# Altium PCB KUOZHAN.PCBDOC (part 19 of 21)
Units mm, origin at the board's own origin, x right, y up, seen from the top; angles counter-clockwise.
Board outline 165.51 x 116.38 mm, 2 copper layers (Top Layer, Bottom Layer); 171 components, 245 nets, 894 pads, 298 vias.
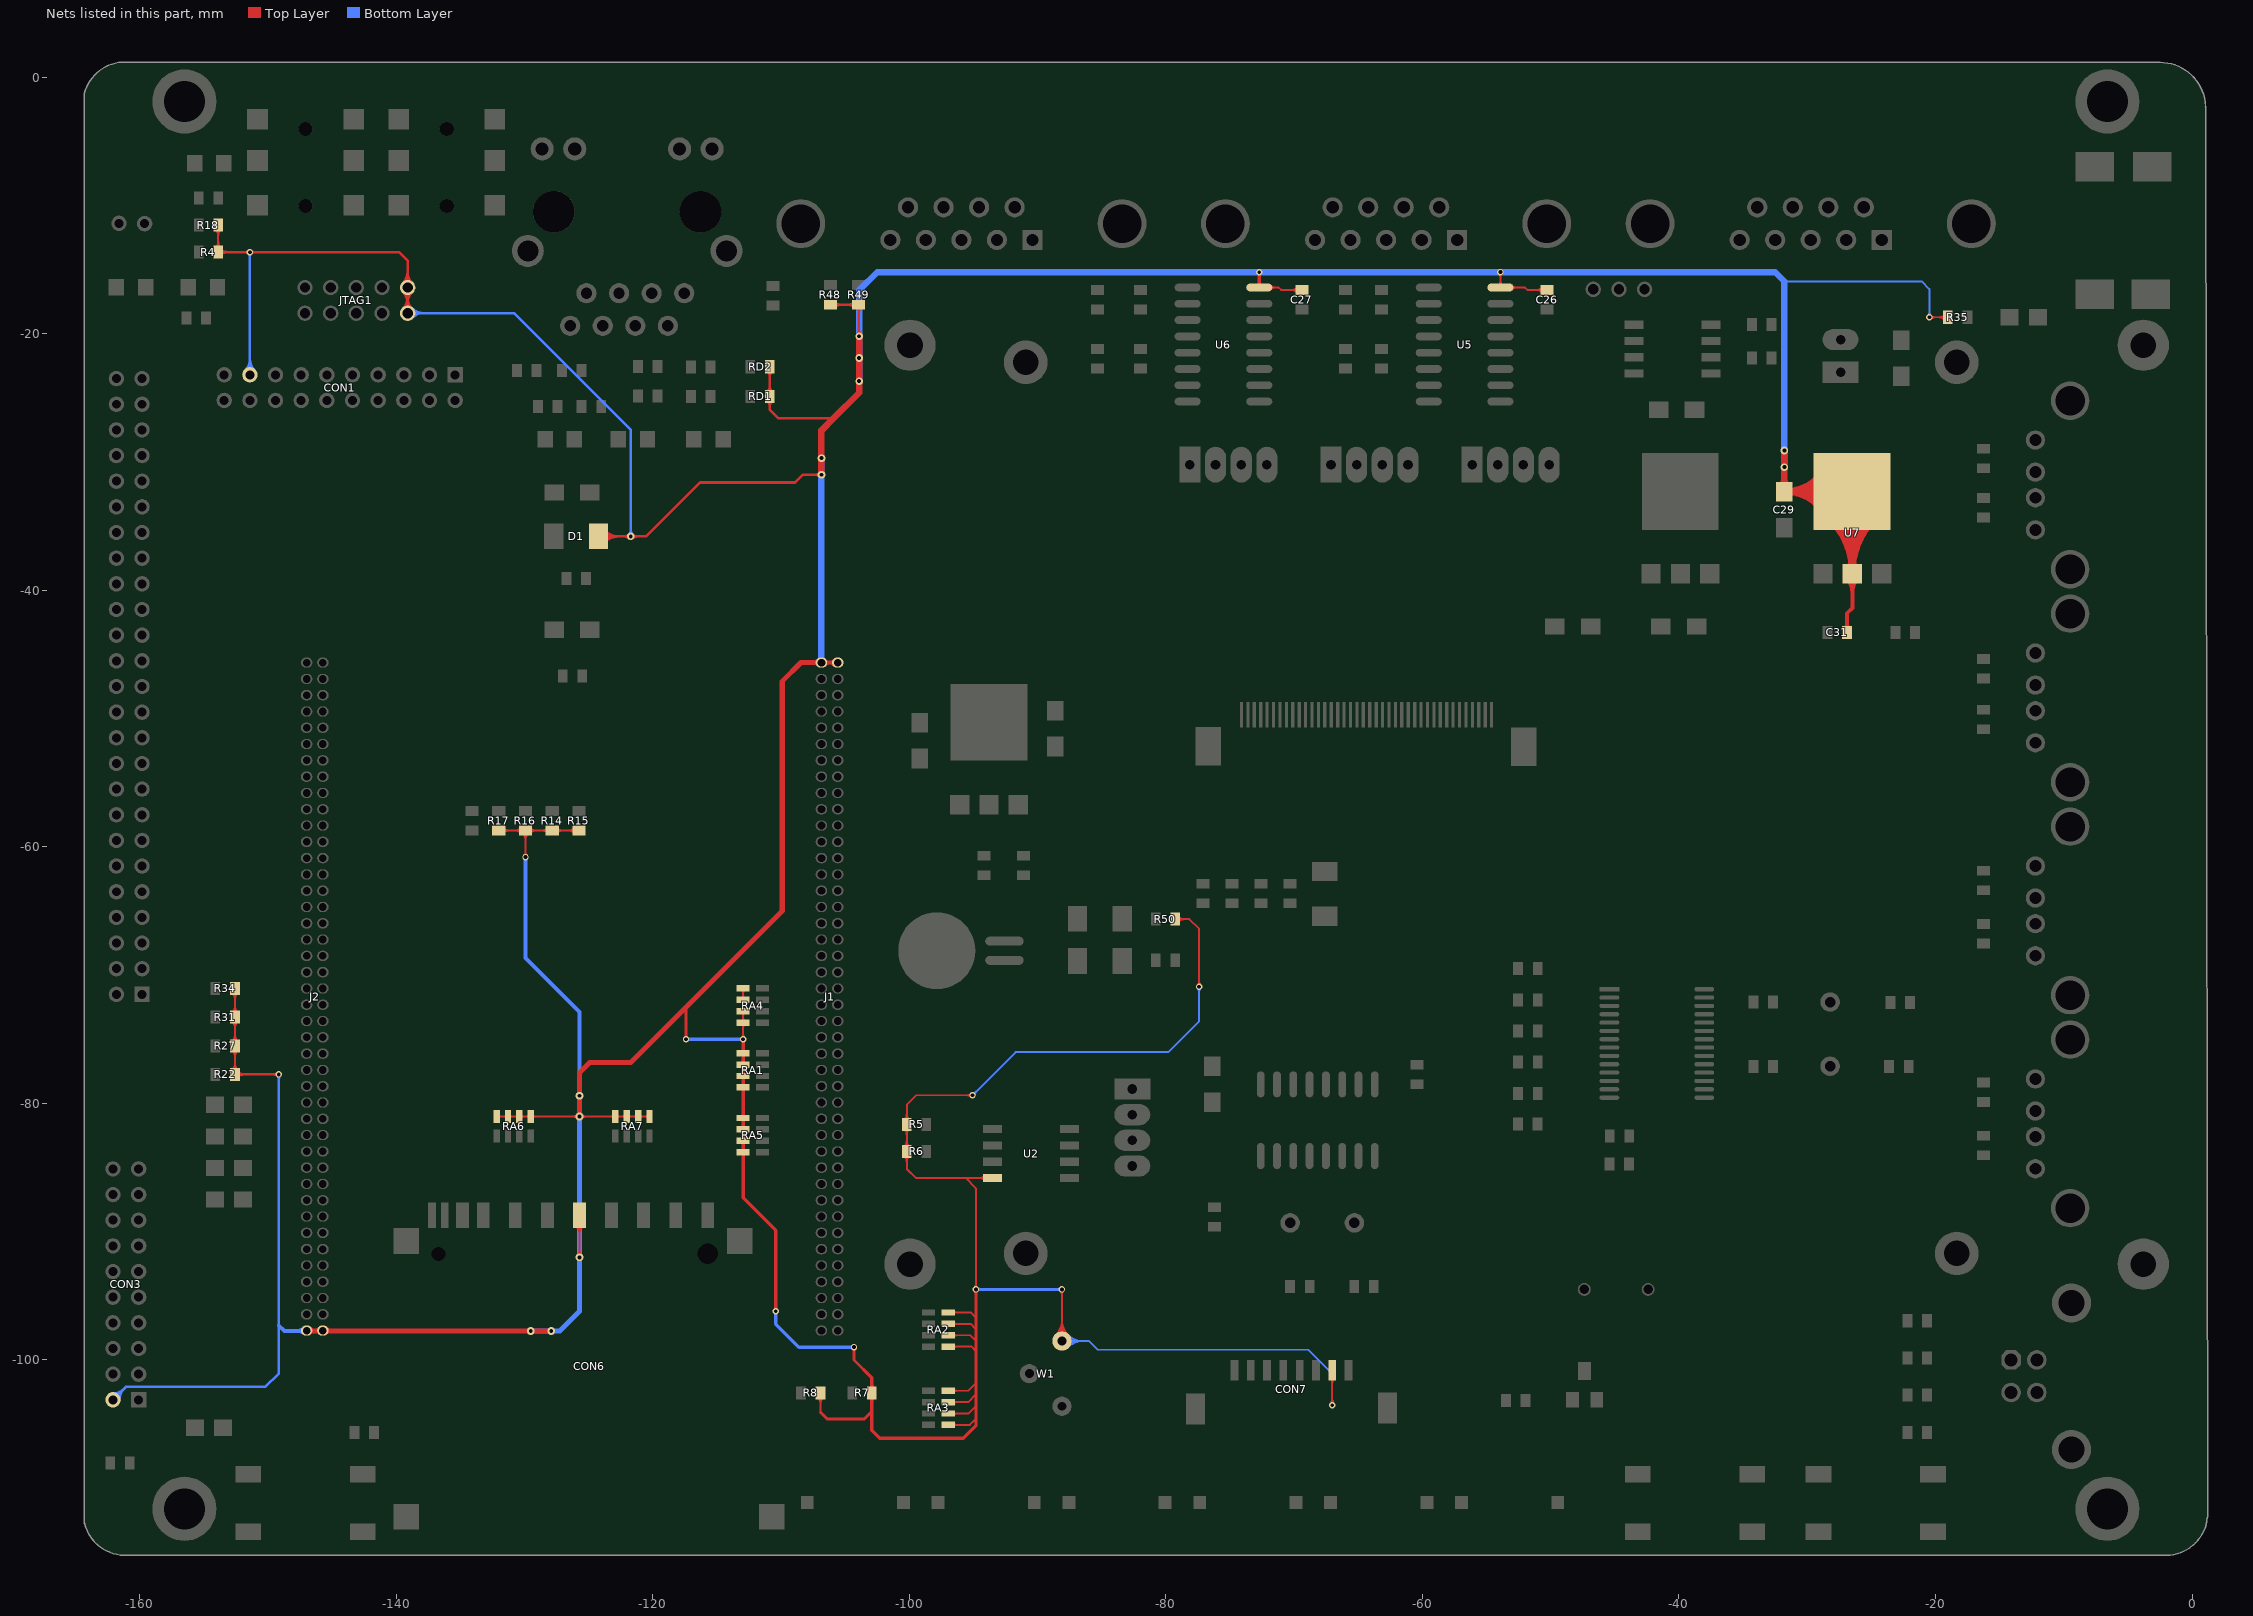
[diagram p19: the nets of this part, all layers, seen from the top]

## Via types
v1: diameter 0.5, hole 0.3, Top Layer to Bottom Layer, 272 vias
v2: diameter 0.6, hole 0.3, Top Layer to Bottom Layer, 24 vias
v3: diameter 0.9, hole 0.9, Top Layer to Bottom Layer, 2 vias

## Nets (pads, with @x,y where several pads share a name; then routed paths per layer and width w, separated by ;. In a path a pad name is that pad's centre, name@x,y a point inside that pad or via, vN(x,y) a via of type N, cw(c..) or ccw(c..) an arc to the next point about the centre after c; other vN are vias at no path point) (continued)
VDD33V: C26.1 C27.1 C29.1 C31.1 CON1.17 CON3.2 CON6.4 CON7.7 D1.1 J1.1 J1.2 J2.83 J2.84 JTAG1.1 JTAG1.2 R4.2 R5.1 R6.1 R7.1 R8.1 R14.1 R15.1 R16.1 R17.1 R18.2 R22.2 R27.2 R31.2 R34.2 R35.2 R48.2 R49.2 R50.2 RA1.5 RA1.6 RA1.7 RA1.8 RA2.5 RA2.6 RA2.7 RA2.8 RA3.5 RA3.6 RA3.7 RA3.8 RA4.5 RA4.6 RA4.7 RA4.8 RA5.5 RA5.6 RA5.7 RA5.8 RA6.1 RA6.2 RA6.3 RA6.4 RA7.1 RA7.2 RA7.3 RA7.4 RD1.2 RD2.2 U2.8 U5.16 U6.16 U7.3 U7.4 W1.2 | length 1499.5
  Top Layer w0.15: R4.2@-153.863,-13.64 R18.2@-153.863,-11.54 ; R22.2@-152.563,-77.74 R27.2@-152.563,-75.507 R31.2@-152.563,-73.274 R34.2@-152.563,-71.04 ; RA6.4@-132.163,-81.02 RA6.3@-131.274,-81.02 RA6.2@-130.385,-81.02 RA6.1@-129.496,-81.02 -125.703,-81.02 RA7.4@-122.909,-81.02 RA7.3@-122.02,-81.02 RA7.2@-121.131,-81.02 RA7.1@-120.242,-81.02 ; R17.1@-131.995,-58.724 R16.1@-129.91,-58.724 ; v1@-129.998,-60.712 ccw(c-130.212,-60.498) -129.91,-60.498 ccw(c-129.608,-60.498) v1@-129.822,-60.712 ; v1(-129.91,-60.8) R16.1@-129.91,-58.724 ; R15.1@-125.741,-58.724 R14.1@-127.825,-58.724 R16.1@-129.91,-58.724 ; v2@-125.703,-91.997 CON6.4@-125.703,-88.729 ; v1@-117.524,-74.876 ccw(c-117.822,-74.578) -117.4,-74.578 ccw(c-116.978,-74.578) v1@-117.276,-74.876 ; v1@-117.488,-74.912 ccw(c-117.702,-74.698) -117.4,-74.698 ccw(c-117.098,-74.698) v1@-117.312,-74.912 ; v1@-113.067,-75.124 cw(c-113.366,-75.422) -112.944,-75.422 cw(c-112.521,-75.422) v1@-112.82,-75.124 ; v1@-113.032,-75.088 cw(c-113.245,-75.302) -112.944,-75.302 cw(c-112.642,-75.302) v1@-112.855,-75.088 ; v1@-113.032,-74.912 ccw(c-113.245,-74.698) -112.944,-74.698 ccw(c-112.642,-74.698) v1@-112.855,-74.912 ; v1(-112.944,-75) RA4.8@-112.944,-73.704 RA4.7@-112.944,-72.815 RA4.6@-112.944,-71.926 RA4.5@-112.944,-71.037 ; -106.913,-104.087 R8.1@-106.913,-102.56 ; R5.1@-100.404,-81.297 ccw(c-100.926,-80.775) -100.187,-80.775 ccw(c-99.449,-80.775) R5.1@-99.971,-81.297 ; RA3.5@-96.956,-105.063 -95.263,-105.063 -94.8,-104.6 ; RA3.6@-96.956,-104.174 -95.4,-104.174 -94.826,-103.6 ; RA3.7@-96.956,-103.285 -95.4,-103.285 -94.8,-102.685 ; RA3.8@-96.956,-102.396 -95.5,-102.396 ; RA2.5@-96.956,-98.963 -95.137,-98.963 -94.8,-99.3 ; RA2.6@-96.956,-98.074 -95.226,-98.074 -94.8,-98.5 ; RA2.7@-96.956,-97.185 -95.215,-97.185 -94.8,-97.6 ; RA2.8@-96.956,-96.296 -95.204,-96.296 -94.8,-96.7 ; RA3.5@-96.575,-105.187 cw(c-96.276,-105.486) -96.276,-105.063 cw(c-96.276,-104.641) RA3.5@-96.575,-104.939 ; -95.4,-102.396 -95.5,-102.396 ; v1@-95.189,-79.489 ccw(c-95.488,-79.788) -95.488,-79.365 ccw(c-95.488,-78.943) v1@-95.189,-79.241 ; v1(-95.065,-79.365) -99.465,-79.365 -100.187,-80.087 R5.1@-100.187,-81.64 R6.1@-100.187,-83.74 -100.187,-85.113 -99.488,-85.812 -95.6,-85.812 ; -94.8,-101.8 -95.396,-102.396 -95.5,-102.396 ; v1(-94.8,-94.5) -94.8,-86.612 -95.6,-85.812 ; U2.8@-93.498,-85.812 -95.6,-85.812 ; v1@-88.095,-94.5 W1.2@-88.095,-98.527 W1.2@-88,-98.432 ; R50.2@-79.263,-65.64 -78.16,-65.64 -77.4,-66.4 v1(-77.4,-70.9) ; R50.2@-79.047,-65.857 cw(c-78.525,-66.379) -78.525,-65.64 cw(c-78.525,-64.902) R50.2@-79.047,-65.424 ; v1@-77.524,-70.776 ccw(c-77.822,-70.478) -77.4,-70.478 ccw(c-76.978,-70.478) v1@-77.276,-70.776 ; U6.16@-72.712,-16.4 -71.2,-16.4 -71.01,-16.59 C27.1@-69.383,-16.59 ; CON7.7@-67.184,-101.447 cw(c-67.568,-101.831) -67.025,-101.831 cw(c-66.482,-101.831) CON7.7@-66.866,-101.447 ; v1@-67.149,-103.401 ccw(c-67.447,-103.103) -67.025,-103.103 ccw(c-66.603,-103.103) v1@-66.901,-103.401 ; v1(-67.025,-103.525) CON7.7@-67.025,-100.788 ; v1@-54,-15.288 cw(c-54.214,-15.502) -53.912,-15.502 cw(c-53.61,-15.502) v1@-53.824,-15.288 ; v1@-53.912,-15.112 v1(-53.912,-15.2) U5.16@-53.912,-16.4 -52,-16.4 -51.81,-16.59 C26.1@-50.283,-16.59 ; v1(-20.481,-18.719) R35.2@-19.037,-18.719 ; v1@-20.357,-18.843 cw(c-20.058,-19.142) -20.058,-18.719 cw(c-20.058,-18.297) v1@-20.357,-18.595 ; R35.2@-19.253,-18.936 ccw(c-19.775,-19.458) -19.775,-18.719 ccw(c-19.775,-17.98) R35.2@-19.253,-18.503 ; R4.2@-154.08,-13.297 ccw(c-154.602,-12.775) -153.863,-12.775 ; R4.2@-154.08,-13.297 ccw(c-154.602,-12.775) -153.863,-12.775 ; R4.2@-154.08,-13.297 ccw(c-154.602,-12.775) -153.863,-12.775 ; R4.2@-154.08,-13.297 ccw(c-154.602,-12.775) -153.863,-12.775 ; R4.2@-154.08,-13.297 ccw(c-154.602,-12.775) -153.863,-12.775 ; R18.2@-154.08,-11.884 cw(c-154.602,-12.406) -153.863,-12.406 ; R18.2@-154.08,-11.884 cw(c-154.602,-12.406) -153.863,-12.406 ; R18.2@-154.08,-11.884 cw(c-154.602,-12.406) -153.863,-12.406 ; R18.2@-154.08,-11.884 cw(c-154.602,-12.406) -153.863,-12.406 ; R18.2@-154.08,-11.884 cw(c-154.602,-12.406) -153.863,-12.406 ; -153.863,-12.775 ccw(c-153.125,-12.775) R4.2@-153.647,-13.297 ; -153.863,-12.775 ccw(c-153.125,-12.775) R4.2@-153.647,-13.297 ; -153.863,-12.775 ccw(c-153.125,-12.775) R4.2@-153.647,-13.297 ; -153.863,-12.775 ccw(c-153.125,-12.775) R4.2@-153.647,-13.297 ; -153.863,-12.775 ccw(c-153.125,-12.775) R4.2@-153.647,-13.297 ; -153.863,-12.406 cw(c-153.125,-12.406) R18.2@-153.647,-11.884 ; -153.863,-12.406 cw(c-153.125,-12.406) R18.2@-153.647,-11.884 ; -153.863,-12.406 cw(c-153.125,-12.406) R18.2@-153.647,-11.884 ; -153.863,-12.406 cw(c-153.125,-12.406) R18.2@-153.647,-11.884 ; -153.863,-12.406 cw(c-153.125,-12.406) R18.2@-153.647,-11.884 ; R22.2@-152.78,-77.397 ccw(c-153.302,-76.875) -152.563,-76.875 ; R22.2@-152.78,-77.397 ccw(c-153.302,-76.875) -152.563,-76.875 ; R22.2@-152.78,-77.397 ccw(c-153.302,-76.875) -152.563,-76.875 ; R22.2@-152.78,-77.397 ccw(c-153.302,-76.875) -152.563,-76.875 ; R22.2@-152.78,-77.397 ccw(c-153.302,-76.875) -152.563,-76.875 ; R27.2@-152.78,-75.85 cw(c-153.302,-76.373) -152.563,-76.373 ; R27.2@-152.78,-75.85 cw(c-153.302,-76.373) -152.563,-76.373 ; R27.2@-152.78,-75.85 cw(c-153.302,-76.373) -152.563,-76.373 ; R27.2@-152.78,-75.85 cw(c-153.302,-76.373) -152.563,-76.373 ; R27.2@-152.78,-75.85 cw(c-153.302,-76.373) -152.563,-76.373 ; R27.2@-152.78,-75.164 ccw(c-153.302,-74.641) -152.563,-74.641 ; R27.2@-152.78,-75.164 ccw(c-153.302,-74.641) -152.563,-74.641 ; R27.2@-152.78,-75.164 ccw(c-153.302,-74.641) -152.563,-74.641 ; R27.2@-152.78,-75.164 ccw(c-153.302,-74.641) -152.563,-74.641 ; R27.2@-152.78,-75.164 ccw(c-153.302,-74.641) -152.563,-74.641 ; R31.2@-152.78,-73.617 cw(c-153.302,-74.139) -152.563,-74.139 ; R31.2@-152.78,-73.617 cw(c-153.302,-74.139) -152.563,-74.139 ; R31.2@-152.78,-73.617 cw(c-153.302,-74.139) -152.563,-74.139 ; R31.2@-152.78,-73.617 cw(c-153.302,-74.139) -152.563,-74.139 ; R31.2@-152.78,-73.617 cw(c-153.302,-74.139) -152.563,-74.139 ; R31.2@-152.78,-72.93 ccw(c-153.302,-72.408) -152.563,-72.408 ; R31.2@-152.78,-72.93 ccw(c-153.302,-72.408) -152.563,-72.408 ; R31.2@-152.78,-72.93 ccw(c-153.302,-72.408) -152.563,-72.408 ; R31.2@-152.78,-72.93 ccw(c-153.302,-72.408) -152.563,-72.408 ; R31.2@-152.78,-72.93 ccw(c-153.302,-72.408) -152.563,-72.408 ; R34.2@-152.78,-71.384 cw(c-153.302,-71.906) -152.563,-71.906 ; R34.2@-152.78,-71.384 cw(c-153.302,-71.906) -152.563,-71.906 ; R34.2@-152.78,-71.384 cw(c-153.302,-71.906) -152.563,-71.906 ; R34.2@-152.78,-71.384 cw(c-153.302,-71.906) -152.563,-71.906 ; R34.2@-152.78,-71.384 cw(c-153.302,-71.906) -152.563,-71.906 ; -152.563,-76.875 ccw(c-151.825,-76.875) R22.2@-152.347,-77.397 ; -152.563,-76.875 ccw(c-151.825,-76.875) R22.2@-152.347,-77.397 ; -152.563,-76.875 ccw(c-151.825,-76.875) R22.2@-152.347,-77.397 ; -152.563,-76.875 ccw(c-151.825,-76.875) R22.2@-152.347,-77.397 ; -152.563,-76.875 ccw(c-151.825,-76.875) R22.2@-152.347,-77.397 ; -152.563,-76.373 cw(c-151.825,-76.373) R27.2@-152.347,-75.85 ; -152.563,-76.373 cw(c-151.825,-76.373) R27.2@-152.347,-75.85 ; -152.563,-76.373 cw(c-151.825,-76.373) R27.2@-152.347,-75.85 ; -152.563,-76.373 cw(c-151.825,-76.373) R27.2@-152.347,-75.85 ; -152.563,-76.373 cw(c-151.825,-76.373) R27.2@-152.347,-75.85 ; -152.563,-74.641 ccw(c-151.825,-74.641) R27.2@-152.347,-75.164 ; -152.563,-74.641 ccw(c-151.825,-74.641) R27.2@-152.347,-75.164 ; -152.563,-74.641 ccw(c-151.825,-74.641) R27.2@-152.347,-75.164 ; -152.563,-74.641 ccw(c-151.825,-74.641) R27.2@-152.347,-75.164 ; -152.563,-74.641 ccw(c-151.825,-74.641) R27.2@-152.347,-75.164 ; -152.563,-74.139 cw(c-151.825,-74.139) R31.2@-152.347,-73.617 ; -152.563,-74.139 cw(c-151.825,-74.139) R31.2@-152.347,-73.617 ; -152.563,-74.139 cw(c-151.825,-74.139) R31.2@-152.347,-73.617 ; -152.563,-74.139 cw(c-151.825,-74.139) R31.2@-152.347,-73.617 ; -152.563,-74.139 cw(c-151.825,-74.139) R31.2@-152.347,-73.617 ; -152.563,-72.408 ccw(c-151.825,-72.408) R31.2@-152.347,-72.93 ; -152.563,-72.408 ccw(c-151.825,-72.408) R31.2@-152.347,-72.93 ; -152.563,-72.408 ccw(c-151.825,-72.408) R31.2@-152.347,-72.93 ; -152.563,-72.408 ccw(c-151.825,-72.408) R31.2@-152.347,-72.93 ; -152.563,-72.408 ccw(c-151.825,-72.408) R31.2@-152.347,-72.93 ; -152.563,-71.906 cw(c-151.825,-71.906) R34.2@-152.347,-71.384 ; -152.563,-71.906 cw(c-151.825,-71.906) R34.2@-152.347,-71.384 ; -152.563,-71.906 cw(c-151.825,-71.906) R34.2@-152.347,-71.384 ; -152.563,-71.906 cw(c-151.825,-71.906) R34.2@-152.347,-71.384 ; -152.563,-71.906 cw(c-151.825,-71.906) R34.2@-152.347,-71.384 ; RA6.4@-132.039,-81.143 cw(c-131.741,-81.442) -131.741,-81.02 ; RA6.4@-132.039,-81.143 cw(c-131.741,-81.442) -131.741,-81.02 ; RA6.4@-132.039,-81.143 cw(c-131.741,-81.442) -131.741,-81.02 ; RA6.4@-132.039,-81.143 cw(c-131.741,-81.442) -131.741,-81.02 ; RA6.4@-132.039,-81.143 cw(c-131.741,-81.442) -131.741,-81.02 ; RA6.4@-132.039,-80.896 ccw(c-131.741,-80.597) -131.741,-81.02 ; RA6.4@-132.039,-80.896 ccw(c-131.741,-80.597) -131.741,-81.02 ; RA6.4@-132.039,-80.896 ccw(c-131.741,-80.597) -131.741,-81.02 ; RA6.4@-132.039,-80.896 ccw(c-131.741,-80.597) -131.741,-81.02 ; RA6.4@-132.039,-80.896 ccw(c-131.741,-80.597) -131.741,-81.02 ; -131.697,-81.02 cw(c-131.697,-81.442) RA6.3@-131.398,-81.143 ; -131.697,-81.02 ccw(c-131.697,-80.597) RA6.3@-131.398,-80.896 ; -131.697,-81.02 cw(c-131.697,-81.442) RA6.3@-131.398,-81.143 ; -131.697,-81.02 ccw(c-131.697,-80.597) RA6.3@-131.398,-80.896 ; -131.697,-81.02 cw(c-131.697,-81.442) RA6.3@-131.398,-81.143 ; -131.697,-81.02 ccw(c-131.697,-80.597) RA6.3@-131.398,-80.896 ; -131.697,-81.02 cw(c-131.697,-81.442) RA6.3@-131.398,-81.143 ; -131.697,-81.02 ccw(c-131.697,-80.597) RA6.3@-131.398,-80.896 ; -131.697,-81.02 ccw(c-131.697,-80.597) RA6.3@-131.398,-80.896 ; -131.697,-81.02 cw(c-131.697,-81.442) RA6.3@-131.398,-81.143 ; R17.1@-131.651,-58.94 cw(c-131.129,-59.463) -131.129,-58.724 ; R17.1@-131.651,-58.94 cw(c-131.129,-59.463) -131.129,-58.724 ; R17.1@-131.651,-58.94 cw(c-131.129,-59.463) -131.129,-58.724 ; R17.1@-131.651,-58.94 cw(c-131.129,-59.463) -131.129,-58.724 ; R17.1@-131.651,-58.94 cw(c-131.129,-59.463) -131.129,-58.724 ; R17.1@-131.651,-58.508 ccw(c-131.129,-57.985) -131.129,-58.724 ; R17.1@-131.651,-58.508 ccw(c-131.129,-57.985) -131.129,-58.724 ; R17.1@-131.651,-58.508 ccw(c-131.129,-57.985) -131.129,-58.724 ; R17.1@-131.651,-58.508 ccw(c-131.129,-57.985) -131.129,-58.724 ; R17.1@-131.651,-58.508 ccw(c-131.129,-57.985) -131.129,-58.724 ; RA6.3@-131.15,-81.143 cw(c-130.852,-81.442) -130.852,-81.02 ; RA6.3@-131.15,-81.143 cw(c-130.852,-81.442) -130.852,-81.02 ; RA6.3@-131.15,-81.143 cw(c-130.852,-81.442) -130.852,-81.02 ; RA6.3@-131.15,-81.143 cw(c-130.852,-81.442) -130.852,-81.02 ; RA6.3@-131.15,-81.143 cw(c-130.852,-81.442) -130.852,-81.02 ; RA6.3@-131.15,-80.896 ccw(c-130.852,-80.597) -130.852,-81.02 ; RA6.3@-131.15,-80.896 ccw(c-130.852,-80.597) -130.852,-81.02 ; RA6.3@-131.15,-80.896 ccw(c-130.852,-80.597) -130.852,-81.02 ; RA6.3@-131.15,-80.896 ccw(c-130.852,-80.597) -130.852,-81.02 ; RA6.3@-131.15,-80.896 ccw(c-130.852,-80.597) -130.852,-81.02 ; -130.808,-81.02 cw(c-130.808,-81.442) RA6.2@-130.509,-81.143 ; -130.808,-81.02 ccw(c-130.808,-80.597) RA6.2@-130.509,-80.896 ; -130.808,-81.02 cw(c-130.808,-81.442) RA6.2@-130.509,-81.143 ; -130.808,-81.02 ccw(c-130.808,-80.597) RA6.2@-130.509,-80.896 ; -130.808,-81.02 cw(c-130.808,-81.442) RA6.2@-130.509,-81.143 ; -130.808,-81.02 ccw(c-130.808,-80.597) RA6.2@-130.509,-80.896 ; -130.808,-81.02 cw(c-130.808,-81.442) RA6.2@-130.509,-81.143 ; -130.808,-81.02 ccw(c-130.808,-80.597) RA6.2@-130.509,-80.896 ; -130.808,-81.02 ccw(c-130.808,-80.597) RA6.2@-130.509,-80.896 ; -130.808,-81.02 cw(c-130.808,-81.442) RA6.2@-130.509,-81.143 ; -130.776,-58.724 cw(c-130.776,-59.463) R16.1@-130.253,-58.94 ; -130.776,-58.724 ccw(c-130.776,-57.985) R16.1@-130.253,-58.508 ; -130.776,-58.724 cw(c-130.776,-59.463) R16.1@-130.253,-58.94 ; -130.776,-58.724 ccw(c-130.776,-57.985) R16.1@-130.253,-58.508 ; -130.776,-58.724 cw(c-130.776,-59.463) R16.1@-130.253,-58.94 ; -130.776,-58.724 ccw(c-130.776,-57.985) R16.1@-130.253,-58.508 ; -130.776,-58.724 cw(c-130.776,-59.463) R16.1@-130.253,-58.94 ; -130.776,-58.724 ccw(c-130.776,-57.985) R16.1@-130.253,-58.508 ; -130.776,-58.724 ccw(c-130.776,-57.985) R16.1@-130.253,-58.508 ; -130.776,-58.724 cw(c-130.776,-59.463) R16.1@-130.253,-58.94 ; RA6.2@-130.261,-81.143 cw(c-129.963,-81.442) -129.963,-81.02 ; RA6.2@-130.261,-81.143 cw(c-129.963,-81.442) -129.963,-81.02 ; RA6.2@-130.261,-81.143 cw(c-129.963,-81.442) -129.963,-81.02 ; RA6.2@-130.261,-81.143 cw(c-129.963,-81.442) -129.963,-81.02 ; RA6.2@-130.261,-81.143 cw(c-129.963,-81.442) -129.963,-81.02 ; RA6.2@-130.261,-80.896 ccw(c-129.963,-80.597) -129.963,-81.02 ; RA6.2@-130.261,-80.896 ccw(c-129.963,-80.597) -129.963,-81.02 ; RA6.2@-130.261,-80.896 ccw(c-129.963,-80.597) -129.963,-81.02 ; RA6.2@-130.261,-80.896 ccw(c-129.963,-80.597) -129.963,-81.02 ; RA6.2@-130.261,-80.896 ccw(c-129.963,-80.597) -129.963,-81.02 ; R16.1@-130.126,-58.94 cw(c-130.649,-59.463) -129.91,-59.463 ; R16.1@-130.126,-58.94 cw(c-130.649,-59.463) -129.91,-59.463 ; R16.1@-130.126,-58.94 cw(c-130.649,-59.463) -129.91,-59.463 ; R16.1@-130.126,-58.94 cw(c-130.649,-59.463) -129.91,-59.463 ; R16.1@-130.126,-58.94 cw(c-130.649,-59.463) -129.91,-59.463 ; v1@-130.034,-60.676 ccw(c-130.333,-60.378) -129.91,-60.378 ; v1@-130.034,-60.676 ccw(c-130.333,-60.378) -129.91,-60.378 ; v1@-130.034,-60.676 ccw(c-130.333,-60.378) -129.91,-60.378 ; v1@-130.034,-60.676 ccw(c-130.333,-60.378) -129.91,-60.378 ; -129.919,-81.02 cw(c-129.919,-81.442) RA6.1@-129.62,-81.143 ; -129.919,-81.02 ccw(c-129.919,-80.597) RA6.1@-129.62,-80.896 ; -129.919,-81.02 cw(c-129.919,-81.442) RA6.1@-129.62,-81.143 ; -129.919,-81.02 ccw(c-129.919,-80.597) RA6.1@-129.62,-80.896 ; -129.919,-81.02 cw(c-129.919,-81.442) RA6.1@-129.62,-81.143 ; -129.919,-81.02 ccw(c-129.919,-80.597) RA6.1@-129.62,-80.896 ; -129.919,-81.02 cw(c-129.919,-81.442) RA6.1@-129.62,-81.143 ; -129.919,-81.02 ccw(c-129.919,-80.597) RA6.1@-129.62,-80.896 ; -129.919,-81.02 ccw(c-129.919,-80.597) RA6.1@-129.62,-80.896 ; -129.919,-81.02 cw(c-129.919,-81.442) RA6.1@-129.62,-81.143 ; -129.91,-60.378 ccw(c-129.488,-60.378) v1@-129.786,-60.676 ; -129.91,-60.378 ccw(c-129.488,-60.378) v1@-129.786,-60.676 ; -129.91,-60.378 ccw(c-129.488,-60.378) v1@-129.786,-60.676 ; -129.91,-60.378 ccw(c-129.488,-60.378) v1@-129.786,-60.676 ; -129.91,-59.463 cw(c-129.171,-59.463) R16.1@-129.694,-58.94 ; -129.91,-59.463 cw(c-129.171,-59.463) R16.1@-129.694,-58.94 ; -129.91,-59.463 cw(c-129.171,-59.463) R16.1@-129.694,-58.94 ; -129.91,-59.463 cw(c-129.171,-59.463) R16.1@-129.694,-58.94 ; -129.91,-59.463 cw(c-129.171,-59.463) R16.1@-129.694,-58.94 ; R16.1@-129.567,-58.94 cw(c-129.044,-59.463) -129.044,-58.724 ; R16.1@-129.567,-58.94 cw(c-129.044,-59.463) -129.044,-58.724 ; R16.1@-129.567,-58.94 cw(c-129.044,-59.463) -129.044,-58.724 ; R16.1@-129.567,-58.94 cw(c-129.044,-59.463) -129.044,-58.724 ; R16.1@-129.567,-58.94 cw(c-129.044,-59.463) -129.044,-58.724 ; R16.1@-129.567,-58.508 ccw(c-129.044,-57.985) -129.044,-58.724 ; R16.1@-129.567,-58.508 ccw(c-129.044,-57.985) -129.044,-58.724 ; R16.1@-129.567,-58.508 ccw(c-129.044,-57.985) -129.044,-58.724 ; R16.1@-129.567,-58.508 ccw(c-129.044,-57.985) -129.044,-58.724 ; R16.1@-129.567,-58.508 ccw(c-129.044,-57.985) -129.044,-58.724 ; RA6.1@-129.372,-81.143 cw(c-129.074,-81.442) -129.074,-81.02 ; RA6.1@-129.372,-81.143 cw(c-129.074,-81.442) -129.074,-81.02 ; RA6.1@-129.372,-81.143 cw(c-129.074,-81.442) -129.074,-81.02 ; RA6.1@-129.372,-81.143 cw(c-129.074,-81.442) -129.074,-81.02 ; RA6.1@-129.372,-81.143 cw(c-129.074,-81.442) -129.074,-81.02 ; RA6.1@-129.372,-80.896 ccw(c-129.074,-80.597) -129.074,-81.02 ; RA6.1@-129.372,-80.896 ccw(c-129.074,-80.597) -129.074,-81.02 ; RA6.1@-129.372,-80.896 ccw(c-129.074,-80.597) -129.074,-81.02 ; RA6.1@-129.372,-80.896 ccw(c-129.074,-80.597) -129.074,-81.02 ; RA6.1@-129.372,-80.896 ccw(c-129.074,-80.597) -129.074,-81.02 ; -128.691,-58.724 cw(c-128.691,-59.463) R14.1@-128.169,-58.94 ; -128.691,-58.724 ccw(c-128.691,-57.985) R14.1@-128.169,-58.508 ; -128.691,-58.724 cw(c-128.691,-59.463) R14.1@-128.169,-58.94 ; -128.691,-58.724 ccw(c-128.691,-57.985) R14.1@-128.169,-58.508 ; -128.691,-58.724 cw(c-128.691,-59.463) R14.1@-128.169,-58.94 ; -128.691,-58.724 ccw(c-128.691,-57.985) R14.1@-128.169,-58.508 ; -128.691,-58.724 cw(c-128.691,-59.463) R14.1@-128.169,-58.94 ; -128.691,-58.724 ccw(c-128.691,-57.985) R14.1@-128.169,-58.508 ; -128.691,-58.724 ccw(c-128.691,-57.985) R14.1@-128.169,-58.508 ; -128.691,-58.724 cw(c-128.691,-59.463) R14.1@-128.169,-58.94 ; R14.1@-127.482,-58.94 cw(c-126.96,-59.463) -126.96,-58.724 ; R14.1@-127.482,-58.94 cw(c-126.96,-59.463) -126.96,-58.724 ; R14.1@-127.482,-58.94 cw(c-126.96,-59.463) -126.96,-58.724 ; R14.1@-127.482,-58.94 cw(c-126.96,-59.463) -126.96,-58.724 ; R14.1@-127.482,-58.94 cw(c-126.96,-59.463) -126.96,-58.724 ; R14.1@-127.482,-58.508 ccw(c-126.96,-57.985) -126.96,-58.724 ; R14.1@-127.482,-58.508 ccw(c-126.96,-57.985) -126.96,-58.724 ; R14.1@-127.482,-58.508 ccw(c-126.96,-57.985) -126.96,-58.724 ; R14.1@-127.482,-58.508 ccw(c-126.96,-57.985) -126.96,-58.724 ; R14.1@-127.482,-58.508 ccw(c-126.96,-57.985) -126.96,-58.724 ; -126.607,-58.724 cw(c-126.607,-59.463) R15.1@-126.084,-58.94 ; -126.607,-58.724 ccw(c-126.607,-57.985) R15.1@-126.084,-58.508 ; -126.607,-58.724 cw(c-126.607,-59.463) R15.1@-126.084,-58.94 ; -126.607,-58.724 ccw(c-126.607,-57.985) R15.1@-126.084,-58.508 ; -126.607,-58.724 cw(c-126.607,-59.463) R15.1@-126.084,-58.94 ; -126.607,-58.724 ccw(c-126.607,-57.985) R15.1@-126.084,-58.508 ; -126.607,-58.724 cw(c-126.607,-59.463) R15.1@-126.084,-58.94 ; -126.607,-58.724 ccw(c-126.607,-57.985) R15.1@-126.084,-58.508 ; -126.607,-58.724 ccw(c-126.607,-57.985) R15.1@-126.084,-58.508 ; -126.607,-58.724 cw(c-126.607,-59.463) R15.1@-126.084,-58.94 ; -126.253,-81.02 cw(c-126.253,-81.573) v2@-125.862,-81.182 ; -126.253,-81.02 cw(c-126.253,-81.573) v2@-125.862,-81.182 ; -126.253,-81.02 cw(c-126.253,-81.573) v2@-125.862,-81.182 ; -126.253,-81.02 cw(c-126.253,-81.573) v2@-125.862,-81.182 ; -126.253,-81.02 cw(c-126.253,-81.573) v2@-125.862,-81.182 ; -126.239,-81.02 ccw(c-126.239,-80.487) v2@-125.862,-80.864 ; -126.239,-81.02 ccw(c-126.239,-80.487) v2@-125.862,-80.864 ; -126.239,-81.02 ccw(c-126.239,-80.487) v2@-125.862,-80.864 ; -126.239,-81.02 ccw(c-126.239,-80.487) v2@-125.862,-80.864 ; -126.239,-81.02 ccw(c-126.239,-80.487) v2@-125.862,-80.864 ; CON6.4@-126.004,-89.529 cw(c-126.729,-90.255) -125.703,-90.255 ; CON6.4@-126.004,-89.529 cw(c-126.729,-90.255) -125.703,-90.255 ; CON6.4@-126.004,-89.529 cw(c-126.729,-90.255) -125.703,-90.255 ; CON6.4@-126.004,-89.529 cw(c-126.729,-90.255) -125.703,-90.255 ; CON6.4@-126.004,-89.529 cw(c-126.729,-90.255) -125.703,-90.255 ; CON6.4@-125.897,-89.423 cw(c-126.367,-89.893) -125.703,-89.893 ; CON6.4@-125.897,-89.423 cw(c-126.367,-89.893) -125.703,-89.893 ; CON6.4@-125.897,-89.423 cw(c-126.367,-89.893) -125.703,-89.893 ; CON6.4@-125.897,-89.423 cw(c-126.367,-89.893) -125.703,-89.893 ; CON6.4@-125.897,-89.423 cw(c-126.367,-89.893) -125.703,-89.893 ; v2@-125.862,-91.844 ccw(c-126.246,-91.46) -125.703,-91.46 ; v2@-125.862,-91.844 ccw(c-126.246,-91.46) -125.703,-91.46 ; v2@-125.862,-91.844 ccw(c-126.246,-91.46) -125.703,-91.46 ; v2@-125.862,-91.844 ccw(c-126.246,-91.46) -125.703,-91.46 ; v2@-125.862,-91.844 ccw(c-126.246,-91.46) -125.703,-91.46 ; -125.703,-91.46 ccw(c-125.16,-91.46) v2@-125.544,-91.844 ; -125.703,-91.46 ccw(c-125.16,-91.46) v2@-125.544,-91.844 ; -125.703,-91.46 ccw(c-125.16,-91.46) v2@-125.544,-91.844 ; -125.703,-91.46 ccw(c-125.16,-91.46) v2@-125.544,-91.844 ; -125.703,-91.46 ccw(c-125.16,-91.46) v2@-125.544,-91.844 ; -125.703,-90.255 cw(c-124.677,-90.255) CON6.4@-125.402,-89.529 ; -125.703,-90.255 cw(c-124.677,-90.255) CON6.4@-125.402,-89.529 ; -125.703,-90.255 cw(c-124.677,-90.255) CON6.4@-125.402,-89.529 ; -125.703,-90.255 cw(c-124.677,-90.255) CON6.4@-125.402,-89.529 ; -125.703,-90.255 cw(c-124.677,-90.255) CON6.4@-125.402,-89.529 ; -125.703,-89.893 cw(c-125.039,-89.893) CON6.4@-125.509,-89.423 ; -125.703,-89.893 cw(c-125.039,-89.893) CON6.4@-125.509,-89.423 ; -125.703,-89.893 cw(c-125.039,-89.893) CON6.4@-125.509,-89.423 ; -125.703,-89.893 cw(c-125.039,-89.893) CON6.4@-125.509,-89.423 ; -125.703,-89.893 cw(c-125.039,-89.893) CON6.4@-125.509,-89.423 ; v2@-125.544,-81.182 cw(c-125.153,-81.573) -125.153,-81.02 ; v2@-125.544,-81.182 cw(c-125.153,-81.573) -125.153,-81.02 ; v2@-125.544,-81.182 cw(c-125.153,-81.573) -125.153,-81.02 ; v2@-125.544,-81.182 cw(c-125.153,-81.573) -125.153,-81.02 ; v2@-125.544,-81.182 cw(c-125.153,-81.573) -125.153,-81.02 ; v2@-125.544,-80.864 ccw(c-125.167,-80.487) -125.167,-81.02 ; v2@-125.544,-80.864 ccw(c-125.167,-80.487) -125.167,-81.02 ; v2@-125.544,-80.864 ccw(c-125.167,-80.487) -125.167,-81.02 ; v2@-125.544,-80.864 ccw(c-125.167,-80.487) -125.167,-81.02 ; v2@-125.544,-80.864 ccw(c-125.167,-80.487) -125.167,-81.02 ; -123.331,-81.02 cw(c-123.331,-81.442) RA7.4@-123.033,-81.143 ; -123.331,-81.02 ccw(c-123.331,-80.597) RA7.4@-123.033,-80.896 ; -123.331,-81.02 cw(c-123.331,-81.442) RA7.4@-123.033,-81.143 ; -123.331,-81.02 ccw(c-123.331,-80.597) RA7.4@-123.033,-80.896 ; -123.331,-81.02 cw(c-123.331,-81.442) RA7.4@-123.033,-81.143 ; -123.331,-81.02 ccw(c-123.331,-80.597) RA7.4@-123.033,-80.896 ; -123.331,-81.02 cw(c-123.331,-81.442) RA7.4@-123.033,-81.143 ; -123.331,-81.02 ccw(c-123.331,-80.597) RA7.4@-123.033,-80.896 ; -123.331,-81.02 ccw(c-123.331,-80.597) RA7.4@-123.033,-80.896 ; -123.331,-81.02 cw(c-123.331,-81.442) RA7.4@-123.033,-81.143 ; RA7.4@-122.785,-81.143 cw(c-122.486,-81.442) -122.486,-81.02 ; RA7.4@-122.785,-81.143 cw(c-122.486,-81.442) -122.486,-81.02 ; RA7.4@-122.785,-81.143 cw(c-122.486,-81.442) -122.486,-81.02 ; RA7.4@-122.785,-81.143 cw(c-122.486,-81.442) -122.486,-81.02 ; RA7.4@-122.785,-81.143 cw(c-122.486,-81.442) -122.486,-81.02 ; RA7.4@-122.785,-80.896 ccw(c-122.486,-80.597) -122.486,-81.02 ; RA7.4@-122.785,-80.896 ccw(c-122.486,-80.597) -122.486,-81.02 ; RA7.4@-122.785,-80.896 ccw(c-122.486,-80.597) -122.486,-81.02 ; RA7.4@-122.785,-80.896 ccw(c-122.486,-80.597) -122.486,-81.02 ; RA7.4@-122.785,-80.896 ccw(c-122.486,-80.597) -122.486,-81.02 ; -122.442,-81.02 cw(c-122.442,-81.442) RA7.3@-122.144,-81.143 ; -122.442,-81.02 ccw(c-122.442,-80.597) RA7.3@-122.144,-80.896 ; -122.442,-81.02 cw(c-122.442,-81.442) RA7.3@-122.144,-81.143 ; -122.442,-81.02 ccw(c-122.442,-80.597) RA7.3@-122.144,-80.896 ; -122.442,-81.02 cw(c-122.442,-81.442) RA7.3@-122.144,-81.143 ; -122.442,-81.02 ccw(c-122.442,-80.597) RA7.3@-122.144,-80.896 ; -122.442,-81.02 cw(c-122.442,-81.442) RA7.3@-122.144,-81.143 ; -122.442,-81.02 ccw(c-122.442,-80.597) RA7.3@-122.144,-80.896 ; -122.442,-81.02 ccw(c-122.442,-80.597) RA7.3@-122.144,-80.896 ; -122.442,-81.02 cw(c-122.442,-81.442) RA7.3@-122.144,-81.143 ; RA7.3@-121.896,-81.143 cw(c-121.597,-81.442) -121.597,-81.02 ; RA7.3@-121.896,-81.143 cw(c-121.597,-81.442) -121.597,-81.02 ; RA7.3@-121.896,-81.143 cw(c-121.597,-81.442) -121.597,-81.02 ; RA7.3@-121.896,-81.143 cw(c-121.597,-81.442) -121.597,-81.02 ; RA7.3@-121.896,-81.143 cw(c-121.597,-81.442) -121.597,-81.02 ; RA7.3@-121.896,-80.896 ccw(c-121.597,-80.597) -121.597,-81.02 ; RA7.3@-121.896,-80.896 ccw(c-121.597,-80.597) -121.597,-81.02 ; RA7.3@-121.896,-80.896 ccw(c-121.597,-80.597) -121.597,-81.02 ; RA7.3@-121.896,-80.896 ccw(c-121.597,-80.597) -121.597,-81.02 ; RA7.3@-121.896,-80.896 ccw(c-121.597,-80.597) -121.597,-81.02 ; -121.553,-81.02 cw(c-121.553,-81.442) RA7.2@-121.255,-81.143 ; -121.553,-81.02 ccw(c-121.553,-80.597) RA7.2@-121.255,-80.896 ; -121.553,-81.02 cw(c-121.553,-81.442) RA7.2@-121.255,-81.143 ; -121.553,-81.02 ccw(c-121.553,-80.597) RA7.2@-121.255,-80.896 ; -121.553,-81.02 cw(c-121.553,-81.442) RA7.2@-121.255,-81.143 ; -121.553,-81.02 ccw(c-121.553,-80.597) RA7.2@-121.255,-80.896 ; -121.553,-81.02 cw(c-121.553,-81.442) RA7.2@-121.255,-81.143 ; -121.553,-81.02 ccw(c-121.553,-80.597) RA7.2@-121.255,-80.896 ; -121.553,-81.02 ccw(c-121.553,-80.597) RA7.2@-121.255,-80.896 ; -121.553,-81.02 cw(c-121.553,-81.442) RA7.2@-121.255,-81.143 ; RA7.2@-121.007,-81.143 cw(c-120.708,-81.442) -120.708,-81.02 ; RA7.2@-121.007,-81.143 cw(c-120.708,-81.442) -120.708,-81.02 ; RA7.2@-121.007,-81.143 cw(c-120.708,-81.442) -120.708,-81.02 ; RA7.2@-121.007,-81.143 cw(c-120.708,-81.442) -120.708,-81.02 ; RA7.2@-121.007,-81.143 cw(c-120.708,-81.442) -120.708,-81.02 ; RA7.2@-121.007,-80.896 ccw(c-120.708,-80.597) -120.708,-81.02 ; RA7.2@-121.007,-80.896 ccw(c-120.708,-80.597) -120.708,-81.02 ; RA7.2@-121.007,-80.896 ccw(c-120.708,-80.597) -120.708,-81.02 ; RA7.2@-121.007,-80.896 ccw(c-120.708,-80.597) -120.708,-81.02 ; RA7.2@-121.007,-80.896 ccw(c-120.708,-80.597) -120.708,-81.02 ; -120.664,-81.02 cw(c-120.664,-81.442) RA7.1@-120.366,-81.143 ; -120.664,-81.02 ccw(c-120.664,-80.597) RA7.1@-120.366,-80.896 ; -120.664,-81.02 cw(c-120.664,-81.442) RA7.1@-120.366,-81.143 ; -120.664,-81.02 ccw(c-120.664,-80.597) RA7.1@-120.366,-80.896 ; -120.664,-81.02 cw(c-120.664,-81.442) RA7.1@-120.366,-81.143 ; -120.664,-81.02 ccw(c-120.664,-80.597) RA7.1@-120.366,-80.896 ; -120.664,-81.02 cw(c-120.664,-81.442) RA7.1@-120.366,-81.143 ; -120.664,-81.02 ccw(c-120.664,-80.597) RA7.1@-120.366,-80.896 ; -120.664,-81.02 ccw(c-120.664,-80.597) RA7.1@-120.366,-80.896 ; -120.664,-81.02 cw(c-120.664,-81.442) RA7.1@-120.366,-81.143 ; v1@-113.067,-74.876 ccw(c-113.366,-74.578) -112.944,-74.578 ; v1@-113.067,-74.876 ccw(c-113.366,-74.578) -112.944,-74.578 ; v1@-113.067,-74.876 ccw(c-113.366,-74.578) -112.944,-74.578 ; v1@-113.067,-74.876 ccw(c-113.366,-74.578) -112.944,-74.578 ; RA4.8@-113.067,-73.828 cw(c-113.366,-74.126) -112.944,-74.126 ; RA4.8@-113.067,-73.828 cw(c-113.366,-74.126) -112.944,-74.126 ; RA4.8@-113.067,-73.828 cw(c-113.366,-74.126) -112.944,-74.126 ; RA4.8@-113.067,-73.828 cw(c-113.366,-74.126) -112.944,-74.126 ; RA4.8@-113.067,-73.828 cw(c-113.366,-74.126) -112.944,-74.126 ; RA4.8@-113.067,-73.58 ccw(c-113.366,-73.281) -112.944,-73.281 ; RA4.8@-113.067,-73.58 ccw(c-113.366,-73.281) -112.944,-73.281 ; RA4.8@-113.067,-73.58 ccw(c-113.366,-73.281) -112.944,-73.281 ; RA4.8@-113.067,-73.58 ccw(c-113.366,-73.281) -112.944,-73.281 ; RA4.8@-113.067,-73.58 ccw(c-113.366,-73.281) -112.944,-73.281 ; RA4.7@-113.067,-72.939 cw(c-113.366,-73.237) -112.944,-73.237 ; RA4.7@-113.067,-72.939 cw(c-113.366,-73.237) -112.944,-73.237 ; RA4.7@-113.067,-72.939 cw(c-113.366,-73.237) -112.944,-73.237 ; RA4.7@-113.067,-72.939 cw(c-113.366,-73.237) -112.944,-73.237 ; RA4.7@-113.067,-72.939 cw(c-113.366,-73.237) -112.944,-73.237 ; RA4.7@-113.067,-72.691 ccw(c-113.366,-72.392) -112.944,-72.392 ; RA4.7@-113.067,-72.691 ccw(c-113.366,-72.392) -112.944,-72.392 ; RA4.7@-113.067,-72.691 ccw(c-113.366,-72.392) -112.944,-72.392 ; RA4.7@-113.067,-72.691 ccw(c-113.366,-72.392) -112.944,-72.392 ; RA4.7@-113.067,-72.691 ccw(c-113.366,-72.392) -112.944,-72.392 ; RA4.6@-113.067,-72.05 cw(c-113.366,-72.348) -112.944,-72.348 ; RA4.6@-113.067,-72.05 cw(c-113.366,-72.348) -112.944,-72.348 ; RA4.6@-113.067,-72.05 cw(c-113.366,-72.348) -112.944,-72.348 ; RA4.6@-113.067,-72.05 cw(c-113.366,-72.348) -112.944,-72.348 ; RA4.6@-113.067,-72.05 cw(c-113.366,-72.348) -112.944,-72.348 ; RA4.6@-113.067,-71.802 ccw(c-113.366,-71.503) -112.944,-71.503 ; RA4.6@-113.067,-71.802 ccw(c-113.366,-71.503) -112.944,-71.503 ; RA4.6@-113.067,-71.802 ccw(c-113.366,-71.503) -112.944,-71.503 ; RA4.6@-113.067,-71.802 ccw(c-113.366,-71.503) -112.944,-71.503 ; RA4.6@-113.067,-71.802 ccw(c-113.366,-71.503) -112.944,-71.503 ; RA4.5@-113.067,-71.161 cw(c-113.366,-71.459) -112.944,-71.459 ; RA4.5@-113.067,-71.161 cw(c-113.366,-71.459) -112.944,-71.459 ; RA4.5@-113.067,-71.161 cw(c-113.366,-71.459) -112.944,-71.459 ; RA4.5@-113.067,-71.161 cw(c-113.366,-71.459) -112.944,-71.459 ; RA4.5@-113.067,-71.161 cw(c-113.366,-71.459) -112.944,-71.459 ; -112.944,-83.381 cw(c-113.366,-83.381) -113.067,-83.68 ccw(c-113.366,-83.381) -112.944,-83.381 ; -112.944,-83.381 ccw(c-112.521,-83.381) -112.82,-83.68 cw(c-112.521,-83.381) -112.944,-83.381 ; -112.944,-83.337 cw(c-112.521,-83.337) -112.82,-83.039 ccw(c-112.521,-83.337) -112.944,-83.337 ; -112.944,-83.337 ccw(c-113.366,-83.337) -113.067,-83.039 cw(c-113.366,-83.337) -112.944,-83.337 ; -112.944,-82.492 cw(c-113.366,-82.492) -113.067,-82.791 ccw(c-113.366,-82.492) -112.944,-82.492 ; -112.944,-82.492 ccw(c-112.521,-82.492) -112.82,-82.791 cw(c-112.521,-82.492) -112.944,-82.492 ; -112.944,-82.448 cw(c-112.521,-82.448) -112.82,-82.15 ccw(c-112.521,-82.448) -112.944,-82.448 ; -112.944,-82.448 ccw(c-113.366,-82.448) -113.067,-82.15 cw(c-113.366,-82.448) -112.944,-82.448 ; -112.944,-81.603 cw(c-113.366,-81.603) -113.067,-81.902 ccw(c-113.366,-81.603) -112.944,-81.603 ; -112.944,-81.603 ccw(c-112.521,-81.603) -112.82,-81.902 cw(c-112.521,-81.603) -112.944,-81.603 ; -112.944,-81.559 cw(c-112.521,-81.559) -112.82,-81.261 ccw(c-112.521,-81.559) -112.944,-81.559 ; -112.944,-81.559 ccw(c-113.366,-81.559) -113.067,-81.261 cw(c-113.366,-81.559) -112.944,-81.559 ; -112.944,-80.714 cw(c-113.366,-80.714) -113.067,-81.013 ccw(c-113.366,-80.714) -112.944,-80.714 ; -112.944,-80.714 ccw(c-112.521,-80.714) -112.82,-81.013 cw(c-112.521,-80.714) -112.944,-80.714 ; -112.944,-79.176 cw(c-112.521,-79.176) -112.82,-78.878 ccw(c-112.521,-79.176) -112.944,-79.176 ; -112.944,-79.176 ccw(c-113.366,-79.176) -113.067,-78.878 cw(c-113.366,-79.176) -112.944,-79.176 ; -112.944,-78.331 cw(c-113.366,-78.331) -113.067,-78.63 ccw(c-113.366,-78.331) -112.944,-78.331 ; -112.944,-78.331 ccw(c-112.521,-78.331) -112.82,-78.63 cw(c-112.521,-78.331) -112.944,-78.331 ; -112.944,-78.287 cw(c-112.521,-78.287) -112.82,-77.989 ccw(c-112.521,-78.287) -112.944,-78.287 ; -112.944,-78.287 ccw(c-113.366,-78.287) -113.067,-77.989 cw(c-113.366,-78.287) -112.944,-78.287 ; -112.944,-77.442 cw(c-113.366,-77.442) -113.067,-77.741 ccw(c-113.366,-77.442) -112.944,-77.442 ; -112.944,-77.442 ccw(c-112.521,-77.442) -112.82,-77.741 cw(c-112.521,-77.442) -112.944,-77.442 ; -112.944,-77.398 cw(c-112.521,-77.398) -112.82,-77.1 ccw(c-112.521,-77.398) -112.944,-77.398 ; -112.944,-77.398 ccw(c-113.366,-77.398) -113.067,-77.1 cw(c-113.366,-77.398) -112.944,-77.398 ; -112.944,-76.553 cw(c-113.366,-76.553) -113.067,-76.852 ccw(c-113.366,-76.553) -112.944,-76.553 ; -112.944,-76.553 ccw(c-112.521,-76.553) -112.82,-76.852 cw(c-112.521,-76.553) -112.944,-76.553 ; -112.944,-76.509 cw(c-112.521,-76.509) -112.82,-76.211 ccw(c-112.521,-76.509) -112.944,-76.509 ; -112.944,-76.509 ccw(c-113.366,-76.509) -113.067,-76.211 cw(c-113.366,-76.509) -112.944,-76.509 ; -112.944,-75.664 cw(c-113.366,-75.664) -113.067,-75.963 ccw(c-113.366,-75.664) -112.944,-75.664 ; -112.944,-75.664 ccw(c-112.521,-75.664) -112.82,-75.963 cw(c-112.521,-75.664) -112.944,-75.664 ; -112.944,-74.578 ccw(c-112.521,-74.578) v1@-112.82,-74.876 ; -112.944,-74.578 ccw(c-112.521,-74.578) v1@-112.82,-74.876 ; -112.944,-74.578 ccw(c-112.521,-74.578) v1@-112.82,-74.876 ; -112.944,-74.578 ccw(c-112.521,-74.578) v1@-112.82,-74.876 ; -112.944,-74.126 cw(c-112.521,-74.126) RA4.8@-112.82,-73.828 ; -112.944,-74.126 cw(c-112.521,-74.126) RA4.8@-112.82,-73.828 ; -112.944,-74.126 cw(c-112.521,-74.126) RA4.8@-112.82,-73.828 ; -112.944,-74.126 cw(c-112.521,-74.126) RA4.8@-112.82,-73.828 ; -112.944,-74.126 cw(c-112.521,-74.126) RA4.8@-112.82,-73.828 ; -112.944,-73.281 ccw(c-112.521,-73.281) RA4.8@-112.82,-73.58 ; -112.944,-73.281 ccw(c-112.521,-73.281) RA4.8@-112.82,-73.58 ; -112.944,-73.281 ccw(c-112.521,-73.281) RA4.8@-112.82,-73.58 ; -112.944,-73.281 ccw(c-112.521,-73.281) RA4.8@-112.82,-73.58 ; -112.944,-73.281 ccw(c-112.521,-73.281) RA4.8@-112.82,-73.58 ; -112.944,-73.237 cw(c-112.521,-73.237) RA4.7@-112.82,-72.939 ; -112.944,-73.237 cw(c-112.521,-73.237) RA4.7@-112.82,-72.939 ; -112.944,-73.237 cw(c-112.521,-73.237) RA4.7@-112.82,-72.939 ; -112.944,-73.237 cw(c-112.521,-73.237) RA4.7@-112.82,-72.939 ; -112.944,-73.237 cw(c-112.521,-73.237) RA4.7@-112.82,-72.939 ; -112.944,-72.392 ccw(c-112.521,-72.392) RA4.7@-112.82,-72.691 ; -112.944,-72.392 ccw(c-112.521,-72.392) RA4.7@-112.82,-72.691 ; -112.944,-72.392 ccw(c-112.521,-72.392) RA4.7@-112.82,-72.691 ; -112.944,-72.392 ccw(c-112.521,-72.392) RA4.7@-112.82,-72.691 ; -112.944,-72.392 ccw(c-112.521,-72.392) RA4.7@-112.82,-72.691 ; -112.944,-72.348 cw(c-112.521,-72.348) RA4.6@-112.82,-72.05 ; -112.944,-72.348 cw(c-112.521,-72.348) RA4.6@-112.82,-72.05 ; -112.944,-72.348 cw(c-112.521,-72.348) RA4.6@-112.82,-72.05 ; -112.944,-72.348 cw(c-112.521,-72.348) RA4.6@-112.82,-72.05 ; -112.944,-72.348 cw(c-112.521,-72.348) RA4.6@-112.82,-72.05 ; -112.944,-71.503 ccw(c-112.521,-71.503) RA4.6@-112.82,-71.802 ; -112.944,-71.503 ccw(c-112.521,-71.503) RA4.6@-112.82,-71.802 ; -112.944,-71.503 ccw(c-112.521,-71.503) RA4.6@-112.82,-71.802 ; -112.944,-71.503 ccw(c-112.521,-71.503) RA4.6@-112.82,-71.802 ; -112.944,-71.503 ccw(c-112.521,-71.503) RA4.6@-112.82,-71.802 ; -112.944,-71.459 cw(c-112.521,-71.459) RA4.5@-112.82,-71.161 ; -112.944,-71.459 cw(c-112.521,-71.459) RA4.5@-112.82,-71.161 ; -112.944,-71.459 cw(c-112.521,-71.459) RA4.5@-112.82,-71.161 ; -112.944,-71.459 cw(c-112.521,-71.459) RA4.5@-112.82,-71.161 ; -112.944,-71.459 cw(c-112.521,-71.459) RA4.5@-112.82,-71.161 ; R8.1@-107.129,-102.903 cw(c-107.651,-103.425) -106.913,-103.425 ; R8.1@-107.129,-102.903 cw(c-107.651,-103.425) -106.913,-103.425 ; R8.1@-107.129,-102.903 cw(c-107.651,-103.425) -106.913,-103.425 ; R8.1@-107.129,-102.903 cw(c-107.651,-103.425) -106.913,-103.425 ; R8.1@-107.129,-102.903 cw(c-107.651,-103.425) -106.913,-103.425 ; -106.913,-103.425 cw(c-106.174,-103.425) R8.1@-106.696,-102.903 ; -106.913,-103.425 cw(c-106.174,-103.425) R8.1@-106.696,-102.903 ; -106.913,-103.425 cw(c-106.174,-103.425) R8.1@-106.696,-102.903 ; -106.913,-103.425 cw(c-106.174,-103.425) R8.1@-106.696,-102.903 ; -106.913,-103.425 cw(c-106.174,-103.425) R8.1@-106.696,-102.903 ; -102.913,-103.425 cw(c-102.174,-103.425) -102.696,-102.903 ccw(c-102.174,-103.425) -102.913,-103.425 ; -102.913,-103.425 ccw(c-103.651,-103.425) -103.129,-102.903 cw(c-103.651,-103.425) -102.913,-103.425 ; R6.1@-100.404,-84.084 cw(c-100.926,-84.606) -100.187,-84.606 ; R6.1@-100.404,-84.084 cw(c-100.926,-84.606) -100.187,-84.606 ; R6.1@-100.404,-84.084 cw(c-100.926,-84.606) -100.187,-84.606 ; R6.1@-100.404,-84.084 cw(c-100.926,-84.606) -100.187,-84.606 ; R6.1@-100.404,-84.084 cw(c-100.926,-84.606) -100.187,-84.606 ; R6.1@-100.404,-83.397 ccw(c-100.926,-82.875) -100.187,-82.875 ; R6.1@-100.404,-83.397 ccw(c-100.926,-82.875) -100.187,-82.875 ; R6.1@-100.404,-83.397 ccw(c-100.926,-82.875) -100.187,-82.875 ; R6.1@-100.404,-83.397 ccw(c-100.926,-82.875) -100.187,-82.875 ; R6.1@-100.404,-83.397 ccw(c-100.926,-82.875) -100.187,-82.875 ; R5.1@-100.404,-81.984 cw(c-100.926,-82.506) -100.187,-82.506 ; R5.1@-100.404,-81.984 cw(c-100.926,-82.506) -100.187,-82.506 ; R5.1@-100.404,-81.984 cw(c-100.926,-82.506) -100.187,-82.506 ; R5.1@-100.404,-81.984 cw(c-100.926,-82.506) -100.187,-82.506 ; R5.1@-100.404,-81.984 cw(c-100.926,-82.506) -100.187,-82.506 ; -100.187,-84.606 cw(c-99.449,-84.606) R6.1@-99.971,-84.084 ; -100.187,-84.606 cw(c-99.449,-84.606) R6.1@-99.971,-84.084 ; -100.187,-84.606 cw(c-99.449,-84.606) R6.1@-99.971,-84.084 ; -100.187,-84.606 cw(c-99.449,-84.606) R6.1@-99.971,-84.084 ; -100.187,-84.606 cw(c-99.449,-84.606) R6.1@-99.971,-84.084 ; -100.187,-82.875 ccw(c-99.449,-82.875) R6.1@-99.971,-83.397 ; -100.187,-82.875 ccw(c-99.449,-82.875) R6.1@-99.971,-83.397 ; -100.187,-82.875 ccw(c-99.449,-82.875) R6.1@-99.971,-83.397 ; -100.187,-82.875 ccw(c-99.449,-82.875) R6.1@-99.971,-83.397 ; -100.187,-82.875 ccw(c-99.449,-82.875) R6.1@-99.971,-83.397 ; -100.187,-82.506 cw(c-99.449,-82.506) R5.1@-99.971,-81.984 ; -100.187,-82.506 cw(c-99.449,-82.506) R5.1@-99.971,-81.984 ; -100.187,-82.506 cw(c-99.449,-82.506) R5.1@-99.971,-81.984 ; -100.187,-82.506 cw(c-99.449,-82.506) R5.1@-99.971,-81.984 ; -100.187,-82.506 cw(c-99.449,-82.506) R5.1@-99.971,-81.984 ; RA3.6@-96.575,-104.298 cw(c-96.276,-104.597) -96.276,-104.174 ; RA3.6@-96.575,-104.298 cw(c-96.276,-104.597) -96.276,-104.174 ; RA3.6@-96.575,-104.298 cw(c-96.276,-104.597) -96.276,-104.174 ; RA3.6@-96.575,-104.298 cw(c-96.276,-104.597) -96.276,-104.174 ; RA3.6@-96.575,-104.298 cw(c-96.276,-104.597) -96.276,-104.174 ; RA3.6@-96.575,-104.05 ccw(c-96.276,-103.752) -96.276,-104.174 ; RA3.6@-96.575,-104.05 ccw(c-96.276,-103.752) -96.276,-104.174 ; RA3.6@-96.575,-104.05 ccw(c-96.276,-103.752) -96.276,-104.174 ; RA3.6@-96.575,-104.05 ccw(c-96.276,-103.752) -96.276,-104.174 ; RA3.6@-96.575,-104.05 ccw(c-96.276,-103.752) -96.276,-104.174 ; RA3.7@-96.575,-103.409 cw(c-96.276,-103.708) -96.276,-103.285 ; RA3.7@-96.575,-103.409 cw(c-96.276,-103.708) -96.276,-103.285 ; RA3.7@-96.575,-103.409 cw(c-96.276,-103.708) -96.276,-103.285 ; RA3.7@-96.575,-103.409 cw(c-96.276,-103.708) -96.276,-103.285 ; RA3.7@-96.575,-103.409 cw(c-96.276,-103.708) -96.276,-103.285 ; RA3.7@-96.575,-103.161 ccw(c-96.276,-102.863) -96.276,-103.285 ; RA3.7@-96.575,-103.161 ccw(c-96.276,-102.863) -96.276,-103.285 ; RA3.7@-96.575,-103.161 ccw(c-96.276,-102.863) -96.276,-103.285 ; RA3.7@-96.575,-103.161 ccw(c-96.276,-102.863) -96.276,-103.285 ; RA3.7@-96.575,-103.161 ccw(c-96.276,-102.863) -96.276,-103.285 ; RA3.8@-96.575,-102.52 cw(c-96.276,-102.819) -96.276,-102.396 ; RA3.8@-96.575,-102.52 cw(c-96.276,-102.819) -96.276,-102.396 ; RA3.8@-96.575,-102.52 cw(c-96.276,-102.819) -96.276,-102.396 ; RA3.8@-96.575,-102.52 cw(c-96.276,-102.819) -96.276,-102.396 ; RA3.8@-96.575,-102.52 cw(c-96.276,-102.819) -96.276,-102.396 ; RA3.8@-96.575,-102.272 ccw(c-96.276,-101.974) -96.276,-102.396 ; RA3.8@-96.575,-102.272 ccw(c-96.276,-101.974) -96.276,-102.396 ; RA3.8@-96.575,-102.272 ccw(c-96.276,-101.974) -96.276,-102.396 ; RA3.8@-96.575,-102.272 ccw(c-96.276,-101.974) -96.276,-102.396 ; RA3.8@-96.575,-102.272 ccw(c-96.276,-101.974) -96.276,-102.396 ; RA2.5@-96.575,-99.087 cw(c-96.276,-99.386) -96.276,-98.963 ; RA2.5@-96.575,-99.087 cw(c-96.276,-99.386) -96.276,-98.963 ; RA2.5@-96.575,-99.087 cw(c-96.276,-99.386) -96.276,-98.963 ; RA2.5@-96.575,-99.087 cw(c-96.276,-99.386) -96.276,-98.963 ; RA2.5@-96.575,-99.087 cw(c-96.276,-99.386) -96.276,-98.963 ; RA2.5@-96.575,-98.839 ccw(c-96.276,-98.541) -96.276,-98.963 ; RA2.5@-96.575,-98.839 ccw(c-96.276,-98.541) -96.276,-98.963 ; RA2.5@-96.575,-98.839 ccw(c-96.276,-98.541) -96.276,-98.963 ; RA2.5@-96.575,-98.839 ccw(c-96.276,-98.541) -96.276,-98.963 ; RA2.5@-96.575,-98.839 ccw(c-96.276,-98.541) -96.276,-98.963 ; RA2.6@-96.575,-98.198 cw(c-96.276,-98.497) -96.276,-98.074 ; RA2.6@-96.575,-98.198 cw(c-96.276,-98.497) -96.276,-98.074 ; RA2.6@-96.575,-98.198 cw(c-96.276,-98.497) -96.276,-98.074 ; RA2.6@-96.575,-98.198 cw(c-96.276,-98.497) -96.276,-98.074 ; RA2.6@-96.575,-98.198 cw(c-96.276,-98.497) -96.276,-98.074 ; RA2.6@-96.575,-97.95 ccw(c-96.276,-97.652) -96.276,-98.074 ; RA2.6@-96.575,-97.95 ccw(c-96.276,-97.652) -96.276,-98.074 ; RA2.6@-96.575,-97.95 ccw(c-96.276,-97.652) -96.276,-98.074 ; RA2.6@-96.575,-97.95 ccw(c-96.276,-97.652) -96.276,-98.074 ; RA2.6@-96.575,-97.95 ccw(c-96.276,-97.652) -96.276,-98.074 ; RA2.7@-96.575,-97.309 cw(c-96.276,-97.608) -96.276,-97.185 ; RA2.7@-96.575,-97.309 cw(c-96.276,-97.608) -96.276,-97.185 ; RA2.7@-96.575,-97.309 cw(c-96.276,-97.608) -96.276,-97.185 ; RA2.7@-96.575,-97.309 cw(c-96.276,-97.608) -96.276,-97.185 ; RA2.7@-96.575,-97.309 cw(c-96.276,-97.608) -96.276,-97.185 ; RA2.7@-96.575,-97.061 ccw(c-96.276,-96.763) -96.276,-97.185 ; RA2.7@-96.575,-97.061 ccw(c-96.276,-96.763) -96.276,-97.185 ; RA2.7@-96.575,-97.061 ccw(c-96.276,-96.763) -96.276,-97.185 ; RA2.7@-96.575,-97.061 ccw(c-96.276,-96.763) -96.276,-97.185 ; RA2.7@-96.575,-97.061 ccw(c-96.276,-96.763) -96.276,-97.185 ; RA2.8@-96.575,-96.42 cw(c-96.276,-96.719) -96.276,-96.296 ; RA2.8@-96.575,-96.42 cw(c-96.276,-96.719) -96.276,-96.296 ; RA2.8@-96.575,-96.42 cw(c-96.276,-96.719) -96.276,-96.296 ; RA2.8@-96.575,-96.42 cw(c-96.276,-96.719) -96.276,-96.296 ; RA2.8@-96.575,-96.42 cw(c-96.276,-96.719) -96.276,-96.296 ; RA2.8@-96.575,-96.172 ccw(c-96.276,-95.874) -96.276,-96.296 ; RA2.8@-96.575,-96.172 ccw(c-96.276,-95.874) -96.276,-96.296 ; RA2.8@-96.575,-96.172 ccw(c-96.276,-95.874) -96.276,-96.296 ; RA2.8@-96.575,-96.172 ccw(c-96.276,-95.874) -96.276,-96.296 ; RA2.8@-96.575,-96.172 ccw(c-96.276,-95.874) -96.276,-96.296 ; v1@-94.924,-94.376 ccw(c-95.222,-94.078) -94.8,-94.078 ; v1@-94.924,-94.376 ccw(c-95.222,-94.078) -94.8,-94.078 ; v1@-94.924,-94.376 ccw(c-95.222,-94.078) -94.8,-94.078 ; -94.8,-94.078 ccw(c-94.378,-94.078) v1@-94.676,-94.376 ; -94.8,-94.078 ccw(c-94.378,-94.078) v1@-94.676,-94.376 ; -94.8,-94.078 ccw(c-94.378,-94.078) v1@-94.676,-94.376 ; -94.516,-85.812 cw(c-94.516,-86.397) U2.8@-94.102,-85.983 ; -94.516,-85.812 ccw(c-94.516,-85.226) U2.8@-94.102,-85.64 ; -94.516,-85.812 cw(c-94.516,-86.397) U2.8@-94.102,-85.983 ; -94.516,-85.812 ccw(c-94.516,-85.226) U2.8@-94.102,-85.64 ; -94.516,-85.812 cw(c-94.516,-86.397) U2.8@-94.102,-85.983 ; -94.516,-85.812 ccw(c-94.516,-85.226) U2.8@-94.102,-85.64 ; -94.516,-85.812 cw(c-94.516,-86.397) U2.8@-94.102,-85.983 ; -94.516,-85.812 ccw(c-94.516,-85.226) U2.8@-94.102,-85.64 ; -94.516,-85.812 ccw(c-94.516,-85.226) U2.8@-94.102,-85.64 ; -94.516,-85.812 cw(c-94.516,-86.397) U2.8@-94.102,-85.983 ; W1.2@-88.572,-98.049 ccw(c-89.725,-96.897) -88.095,-96.897 ; W1.2@-88.572,-98.049 ccw(c-89.725,-96.897) -88.095,-96.897 ; W1.2@-88.572,-98.049 ccw(c-89.725,-96.897) -88.095,-96.897 ; W1.2@-88.466,-98.155 ccw(c-89.363,-97.259) -88.095,-97.259 ; W1.2@-88.466,-98.155 ccw(c-89.363,-97.259) -88.095,-97.259 ; W1.2@-88.466,-98.155 ccw(c-89.363,-97.259) -88.095,-97.259 ; W1.2@-88.36,-98.261 ccw(c-89,-97.621) -88.095,-97.621 ; W1.2@-88.36,-98.261 ccw(c-89,-97.621) -88.095,-97.621 ; W1.2@-88.36,-98.261 ccw(c-89,-97.621) -88.095,-97.621 ; v1@-88.224,-94.624 cw(c-88.534,-94.934) -88.095,-94.934 ; v1@-88.224,-94.624 cw(c-88.534,-94.934) -88.095,-94.934 ; v1@-88.224,-94.624 cw(c-88.534,-94.934) -88.095,-94.934 ; -88.095,-97.621 ccw(c-87.19,-97.621) W1.2@-87.83,-98.261 ; -88.095,-97.621 ccw(c-87.19,-97.621) W1.2@-87.83,-98.261 ; -88.095,-97.621 ccw(c-87.19,-97.621) W1.2@-87.83,-98.261 ; -88.095,-97.259 ccw(c-86.828,-97.259) W1.2@-87.724,-98.155 ; -88.095,-97.259 ccw(c-86.828,-97.259) W1.2@-87.724,-98.155 ; -88.095,-97.259 ccw(c-86.828,-97.259) W1.2@-87.724,-98.155 ; -88.095,-96.897 ccw(c-86.465,-96.897) W1.2@-87.618,-98.049 ; -88.095,-96.897 ccw(c-86.465,-96.897) W1.2@-87.618,-98.049 ; -88.095,-96.897 ccw(c-86.465,-96.897) W1.2@-87.618,-98.049 ; -88.095,-94.911 cw(c-87.689,-94.911) v1@-87.976,-94.624 ; -88.095,-94.911 cw(c-87.689,-94.911) v1@-87.976,-94.624 ; -88.095,-94.911 cw(c-87.689,-94.911) v1@-87.976,-94.624 ; U6.16@-71.838,-16.562 cw(c-71.446,-16.955) -71.446,-16.4 ; U6.16@-71.838,-16.562 cw(c-71.446,-16.955) -71.446,-16.4 ; U6.16@-71.838,-16.562 cw(c-71.446,-16.955) -71.446,-16.4 ; U6.16@-71.838,-16.562 cw(c-71.446,-16.955) -71.446,-16.4 ; U6.16@-71.838,-16.562 cw(c-71.446,-16.955) -71.446,-16.4 ; U6.16@-71.838,-16.238 ccw(c-71.446,-15.845) -71.446,-16.4 ; U6.16@-71.838,-16.238 ccw(c-71.446,-15.845) -71.446,-16.4 ; U6.16@-71.838,-16.238 ccw(c-71.446,-15.845) -71.446,-16.4 ; U6.16@-71.838,-16.238 ccw(c-71.446,-15.845) -71.446,-16.4 ; U6.16@-71.838,-16.238 ccw(c-71.446,-15.845) -71.446,-16.4 ; -70.249,-16.59 cw(c-70.249,-17.329) C27.1@-69.727,-16.807 ; -70.249,-16.59 ccw(c-70.249,-15.851) C27.1@-69.727,-16.374 ; -70.249,-16.59 cw(c-70.249,-17.329) C27.1@-69.727,-16.807 ; -70.249,-16.59 ccw(c-70.249,-15.851) C27.1@-69.727,-16.374 ; -70.249,-16.59 cw(c-70.249,-17.329) C27.1@-69.727,-16.807 ; -70.249,-16.59 ccw(c-70.249,-15.851) C27.1@-69.727,-16.374 ; -70.249,-16.59 cw(c-70.249,-17.329) C27.1@-69.727,-16.807 ; -70.249,-16.59 ccw(c-70.249,-15.851) C27.1@-69.727,-16.374 ; -70.249,-16.59 ccw(c-70.249,-15.851) C27.1@-69.727,-16.374 ; -70.249,-16.59 cw(c-70.249,-17.329) C27.1@-69.727,-16.807 ; U5.16@-54.074,-16.238 ccw(c-54.467,-15.845) -53.912,-15.845 ; U5.16@-54.074,-16.238 ccw(c-54.467,-15.845) -53.912,-15.845 ; U5.16@-54.074,-16.238 ccw(c-54.467,-15.845) -53.912,-15.845 ; U5.16@-54.074,-16.238 ccw(c-54.467,-15.845) -53.912,-15.845 ; U5.16@-54.074,-16.238 ccw(c-54.467,-15.845) -53.912,-15.845 ; v1@-54.036,-15.324 cw(c-54.334,-15.622) -53.912,-15.622 ; v1@-54.036,-15.324 cw(c-54.334,-15.622) -53.912,-15.622 ; v1@-54.036,-15.324 cw(c-54.334,-15.622) -53.912,-15.622 ; v1@-54.036,-15.324 cw(c-54.334,-15.622) -53.912,-15.622 ; -53.912,-15.845 ccw(c-53.357,-15.845) U5.16@-53.75,-16.238 ; -53.912,-15.845 ccw(c-53.357,-15.845) U5.16@-53.75,-16.238 ; -53.912,-15.845 ccw(c-53.357,-15.845) U5.16@-53.75,-16.238 ; -53.912,-15.845 ccw(c-53.357,-15.845) U5.16@-53.75,-16.238 ; -53.912,-15.845 ccw(c-53.357,-15.845) U5.16@-53.75,-16.238 ; -53.912,-15.622 cw(c-53.49,-15.622) v1@-53.788,-15.324 ; -53.912,-15.622 cw(c-53.49,-15.622) v1@-53.788,-15.324 ; -53.912,-15.622 cw(c-53.49,-15.622) v1@-53.788,-15.324 ; -53.912,-15.622 cw(c-53.49,-15.622) v1@-53.788,-15.324 ; U5.16@-53.038,-16.562 cw(c-52.646,-16.955) -52.646,-16.4 ; U5.16@-53.038,-16.562 cw(c-52.646,-16.955) -52.646,-16.4 ; U5.16@-53.038,-16.562 cw(c-52.646,-16.955) -52.646,-16.4 ; U5.16@-53.038,-16.562 cw(c-52.646,-16.955) -52.646,-16.4 ; U5.16@-53.038,-16.562 cw(c-52.646,-16.955) -52.646,-16.4 ; U5.16@-53.038,-16.238 ccw(c-52.646,-15.845) -52.646,-16.4 ; U5.16@-53.038,-16.238 ccw(c-52.646,-15.845) -52.646,-16.4 ; U5.16@-53.038,-16.238 ccw(c-52.646,-15.845) -52.646,-16.4 ; U5.16@-53.038,-16.238 ccw(c-52.646,-15.845) -52.646,-16.4 ; U5.16@-53.038,-16.238 ccw(c-52.646,-15.845) -52.646,-16.4 ; -51.149,-16.59 cw(c-51.149,-17.329) C26.1@-50.627,-16.807 ; -51.149,-16.59 ccw(c-51.149,-15.851) C26.1@-50.627,-16.374 ; -51.149,-16.59 cw(c-51.149,-17.329) C26.1@-50.627,-16.807 ; -51.149,-16.59 ccw(c-51.149,-15.851) C26.1@-50.627,-16.374 ; -51.149,-16.59 cw(c-51.149,-17.329) C26.1@-50.627,-16.807 ; -51.149,-16.59 ccw(c-51.149,-15.851) C26.1@-50.627,-16.374 ; -51.149,-16.59 cw(c-51.149,-17.329) C26.1@-50.627,-16.807 ; -51.149,-16.59 ccw(c-51.149,-15.851) C26.1@-50.627,-16.374 ; -51.149,-16.59 ccw(c-51.149,-15.851) C26.1@-50.627,-16.374 ; -51.149,-16.59 cw(c-51.149,-17.329) C26.1@-50.627,-16.807